# EAGLE board BEP33_2panel_v2 (EAGLE 7.7.0)
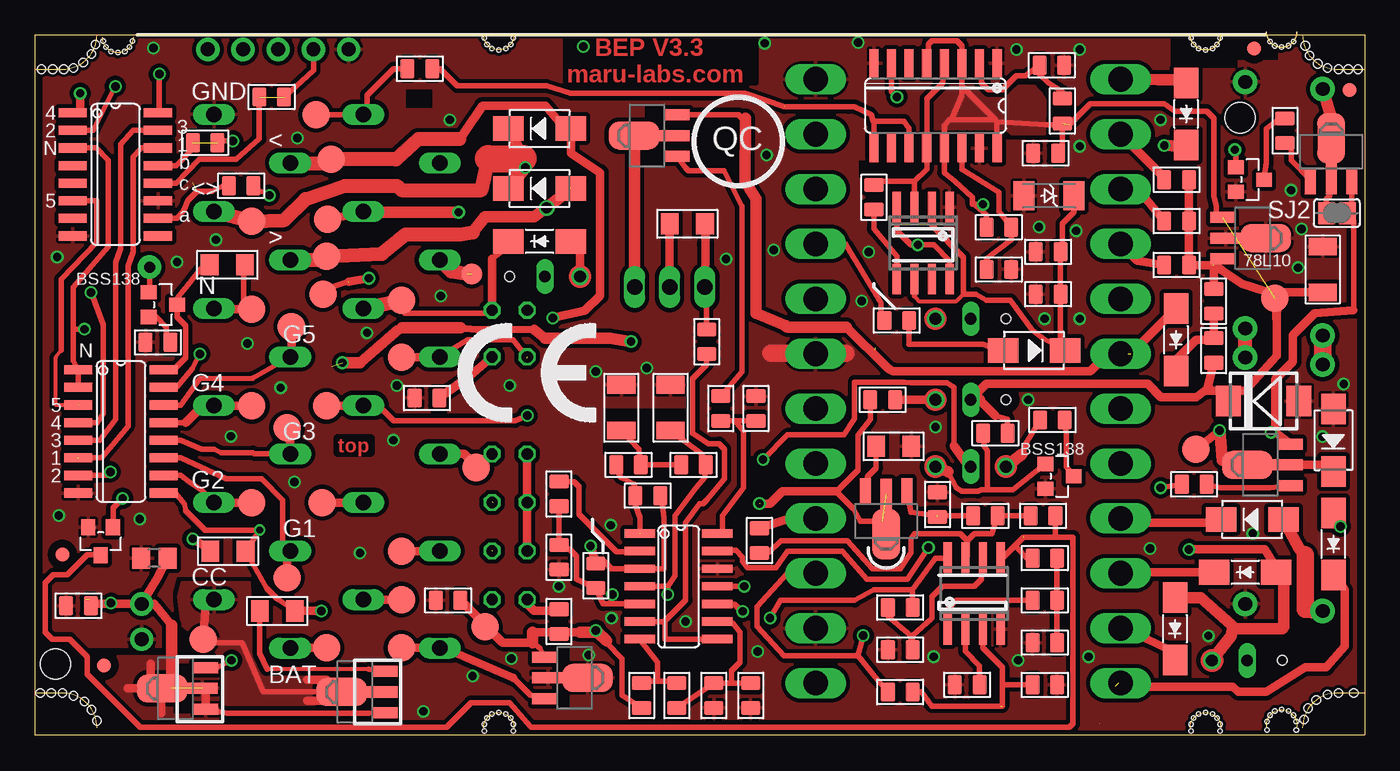
[diagram p0: board, top side]
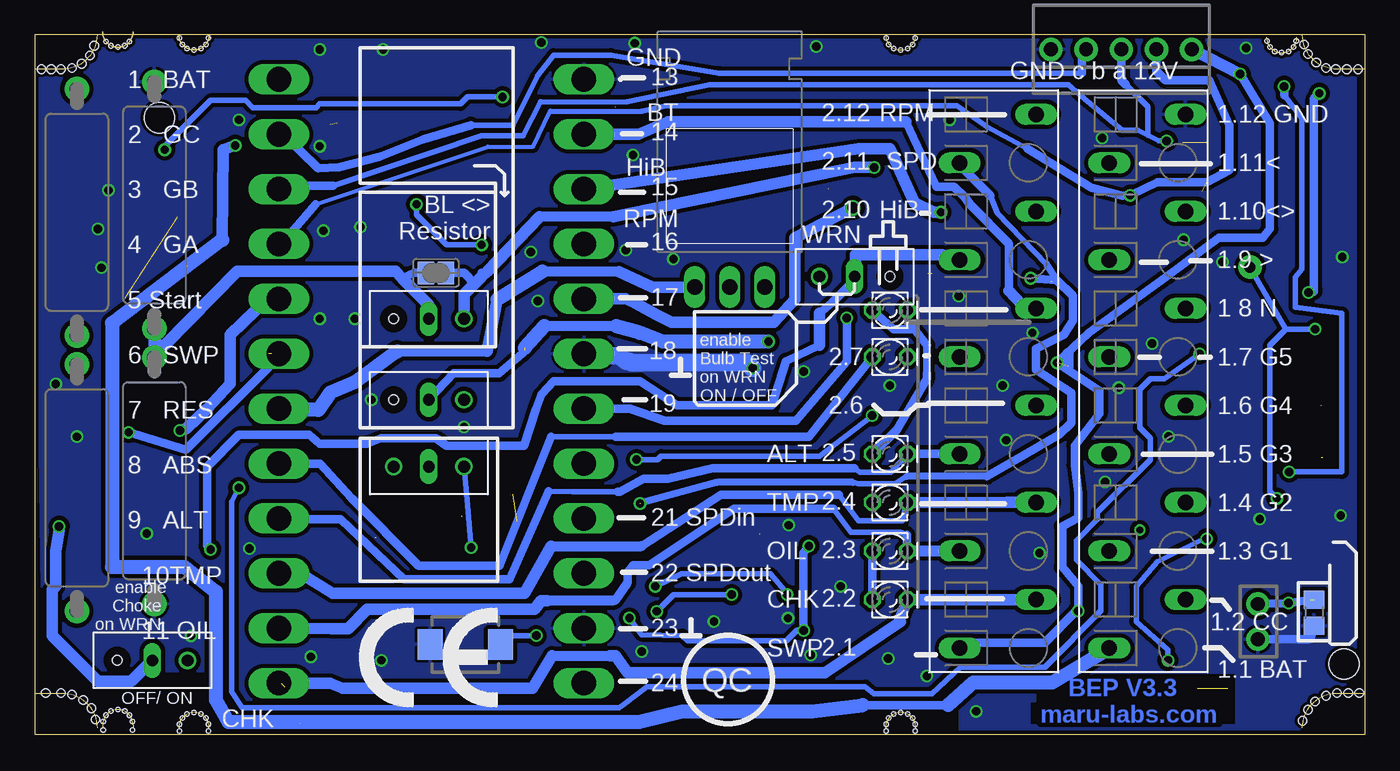
[diagram p1: board, bottom side, seen from below]

Size 96 x 50.5 mm. Coordinates in mm from the lower left corner, seen from the top.
Outline: 0,0 96,0 96,50.5 0,50.5 0,0
Copper layers (1*16): Top 0.035mm / dielectric 1.5mm / Bottom 0.035mm
Design rules "Vorlage BEP3 und hoeher multi-cb_035um-cu": minimum track width 6mil, minimum drill 12mil, track to track 12mil, track to pad 12mil, pad to pad 6mil, via to via 6mil, smd to smd 6mil, copper to edge 10mil, drill to drill 8mil, minimum pad ring 8mil, minimum via ring 6mil, stop-mask expansion 3mil, vias tented up to drill 0mil, thermal gap 8mil
Holes 2.18 mm at 1.5,5.1 87,44.5
Holes 0.6 mm at 4.4,49.8 4.1,49.1 3.5,48.5 2.8,48.1 2.1,48 1.3,48 0.5,48 0.4,3 1.2,3 2,3 2.8,2.8 3.6,2.4 4.1,1.8 4.5,1 91.6,1.1 91.9,1.9 92.5,2.5 93.3,2.9 94.1,3 95.2,3 95.5,48 94.8,48 94.1,48 93.3,48.1 92.6,48.4 92,49 91.7,49.7
Holes 0.3 mm at 83.45,0.75 83.65,1.2 84,1.5 84.5,1.6 85,1.5 85.35,1.2 85.55,0.75 32.45,0.75 32.65,1.2 33,1.5 33.5,1.6 34,1.5 34.35,1.2 34.55,0.75 88.95,0.95 89.15,1.4 89.5,1.7 90,1.8 90.5,1.7 90.85,1.4 91.05,0.95 34.55,0.25 32.45,0.25 85.55,0.25 83.45,0.25 88.95,0.35 91.05,0.35 34.55,50.25 34.35,49.8 34,49.5 33.5,49.4 33,49.5 32.65,49.8 32.45,50.25 85.55,50.25 85.35,49.8 85,49.5 84.5,49.4 84,49.5 83.65,49.8 83.45,50.25 90.85,50 90.5,49.7 90,49.6 89.5,49.7 89.15,50 7.05,50.05 6.85,49.6 6.5,49.3 6,49.2 5.5,49.3 5.15,49.6 4.95,50.05
tRestrict: area 41,20.2 to 47.5,23.5; area 26.8,45.2 to 28.7,46.5; area 58.4,15.8 to 60.2,17.8; area 44.1,41.1 to 45.5,45.4; area 37.3,1.9 to 38.6,6.4; area 10,1.6 to 11.4,5.1; area 88.4,21.6 to 90,22.8; area 86.4,48.7 to 89.7,51.4; area 82,48.1 to 86.8,51.1; area 59.5,40.2 to 63.7,41.4; area 13.4,33.2 to 14.5,34.9; area 7.3,50.5 to 82,50.5; 1 more areas
bRestrict: area 9.4,0.8 to 19.6,4.3; area 19.5,0.8 to 24.1,2.3; area 29.3,0.1 to 35.8,2.3; area 81.6,0.7 to 87.6,4.5; area 7.3,50.5 to 82.3,50.5
Milling: 30 lines

## Footprints (pad centres in the part's own frame; a part is rotated, then mirrored left to right if it is on the bottom)
12-PIN = drill 1.118 long: 1 19.25,-2.45; 2 15.75,3.05; 3 12.25,-2.45; 4 8.75,3.05; 5 5.25,-2.45; 6 1.75,3.05; 7 -1.75,-2.45; 8 -5.25,3.05; 9 -8.75,-2.45; 10 -12.25,3.05; 11 -15.75,-2.45; 12 -19.25,3.05
B2.0 = smd 2 x 2: TP 0,0
C1206 = smd 1.27 x 2.032: 1 -1.651,0; 2 1.651,0
C0805 = smd 1.397 x 1.016: 1 0,0.889; 2 0,-0.889
DO-214AC_SLIM = smd 2.2 x 1.77: 1 -2.242,0; 2 2.242,0
SOD-123_MINI-SMA = smd 1.5 x 2.1: A 1.8,0; C -1.8,0
DO214AA = smd 1.8 x 2.2: A 2.55,0; C -2.55,0
DO-214AC = smd 2.2 x 1.77: 1 -2.242,0; 2 2.242,0
DO214AA_BI = smd 1.8 x 2.2: A 2.45,0; C -2.65,0
FIDUCIAL_1MM = smd 1 x 1: 1 0,0
SO08 = smd 0.6 x 2.2: 1 -1.905,-2.6; 2 -0.635,-2.6; 3 0.635,-2.6; 4 1.905,-2.6; 5 1.905,2.6; 6 0.635,2.6; 7 -0.635,2.6; 8 -1.905,2.6
SOT89_ROUND = smd 0.8 x 1.8: 1 -1.499,-2.181; 3 1.499,-2.181 | smd 0.8 x 2.3: 2 0,-1.927 | smd 2.032 x 3.65: 2@1 0,0.94
SO16 = smd 0.66 x 2.032: 1 -4.445,-3.073; 2 -3.175,-3.073; 3 -1.905,-3.073; 4 -0.635,-3.073; 5 0.635,-3.073; 6 1.905,-3.073; 7 3.175,-3.073; 8 4.445,-3.073; 9 4.445,3.073; 10 3.175,3.073; 11 1.905,3.073; 12 0.635,3.073; 13 -0.635,3.073; 14 -1.905,3.073; 15 -3.175,3.073; 16 -4.445,3.073
SO14 = smd 0.6 x 2.2: 1 -3.81,-2.8; 2 -2.54,-2.8; 3 -1.27,-2.8; 4 0,-2.8; 5 1.27,-2.8; 6 2.54,-2.8; 7 3.81,-2.8; 8 3.81,2.8; 9 2.54,2.8; 10 1.27,2.8; 11 0,2.8; 12 -1.27,2.8; 13 -2.54,2.8; 14 -3.81,2.8
TO220H_NOHOLE = drill 1.118 long: 1 -2.54,-10.16; 2 0,-10.16; 3 2.54,-10.16
JP2_SMALLPADS = drill 0.85: 1 -2.54,0 | drill 0.85 long: 2 0,0 | hole 0.7: 2.54,0
JP2_ORIG_SMALLPADS = drill 0.85: 1 -2.54,0; 3 2.54,0 | drill 0.85 long: 2 0,0
LD260 = drill 0.813 octagon: A -1.27,0; K 1.27,0
SOT-23 = smd 1.016 x 1.143: 1 -0.889,-1.016; 2 0.889,-1.016; 3 0,1.016
SOT89 = smd 0.8 x 1.8: 1 -1.499,-2.181; 3 1.499,-2.181 | smd 0.8 x 2.3: 2 0,-1.927 | smd 2.032 x 3.65: 2@1 0,0.94
R0805 = smd 1.397 x 1.016: 1 0,0.889; 2 0,-0.889
R1206 = smd 1.27 x 1.524: 1 -1.27,0; 2 1.27,0
R0805' = smd 1.3 x 1.5: 1 -0.95,0; 2 0.95,0
V235/17_1MM = drill 1 pad 1.778: 1 -8.89,0; 2 8.89,0
SJ = smd 1.168 x 1.6: 1 -0.762,0; 2 0.762,0
SJ' = smd 1.2 x 1.6: 1 -0.725,0; 2 0.725,0
B1,27 = smd 1.5 x 1.5: TP 0,0
24-PIN_V2 = drill 1.778 long: 1 -21.78,-11; 2 -17.82,-11; 3 -13.86,-11; 4 -9.9,-11; 5 -5.94,-11; 6 -1.98,-11; 7 1.98,-11; 8 5.94,-11; 9 9.9,-11; 10 13.86,-11; 11 17.82,-11; 12 21.78,-11; 13 -21.78,11; 14 -17.82,11; 15 -13.86,11; 16 -9.9,11; 17 -5.94,11; 18 -1.98,11; 19 1.98,11; 20 5.94,11; 21 9.9,11; 22 13.86,11; 23 17.82,11; 24 21.78,11
22-23-2021 = drill 1 pad 1.676: 1 -1.27,0; 2 1.27,0
22-23-2051 = drill 1 pad 1.676: 1 -5.08,0; 2 -2.54,0; 3 0,0; 4 2.54,0; 5 5.08,0

## Placement (x,y rotation side)
1  [12-PIN]  15.99,25.5 270 bottom
2  [12-PIN]  26.79,25.5 270 bottom
6V  TPSB2.0  [B2.0]  32.5,7.78 0 top
10V  TPSB2.0  [B2.0]  89.5,31.5 0 top
C2  10u  [C1206]  92.96,33.56 90 top
C15  4.7u  [C0805]  73.41,48.29 270 top
C101  4.7u  [C0805]  72.9,3.59 90 top
C102  100nF  [C0805]  72.96,41.95 270 top
C103  100nF,  [C0805]  72.9,6.64 270 top
C104  100nF,  [C0805]  29.83,9.68 270 top
C105  100nF.  [C0805]  49.01,2.83 0 top
C106  100nF.  [C0805]  52.06,23.53 0 top
C107  100u  [C1206]  42.34,23.59 90 top
C108  100u  [C1206]  45.9,23.59 90 top
C109  2.2nF  [C0805]  73.14,31.78 90 top
C110  100nF  [C0805]  69.58,33.56 90 top
D1  SS12  [DO-214AC_SLIM]  82.36,28.49 270 top
D2  SS12  [DO-214AC_SLIM]  83.1,44.78 270 top
D4  Zen11  [SOD-123_MINI-SMA]  73.2,38.88 180 top
D101  Zen15  [DO214AA]  88.69,24.07 0 top
D102  1N4007,  [DO-214AC]  36.44,39.4 180 top
D103  1N4007,  [DO-214AC]  36.44,43.72 180 top
D104  SM6TDO214AA_BI  [DO214AA_BI]  65.01,6.51 180 bottom
D105  1N4007.  [DO-214AC]  93.73,21.24 270 top
D106  1N4007.  [DO-214AC]  87.87,15.53 180 top
D107  1N5817  [DO-214AC_SLIM]  87.36,11.72 180 top
D108  1N5817.  [DO-214AC_SLIM]  82.3,7.64 270 top
D109  1N5817.  [DO-214AC_SLIM]  93.73,13.75 270 top
D110  1N5817  [DO-214AC_SLIM]  36.44,35.59 180 top
D112  1N4007  [DO-214AC]  72.12,27.72 0 top
FID101  FIDUCIAL  [FIDUCIAL_1MM]  88,49.5 0 top
FID102  FIDUCIAL  [FIDUCIAL_1MM]  2,13 0 top
FID103  FIDUCIAL  [FIDUCIAL_1MM]  5,5 0 top
FID104  FIDUCIAL  [FIDUCIAL_1MM]  94.9,46.5 0 top
IC101  LM2904  [SO08]  67.81,10.19 0 top
IC102  78L06  [SOT89_ROUND]  38.98,4.1 270 top
IC104  78L10  [SOT89_ROUND]  87.91,35.82 270 top
IC105  4028  [SO16]  5.83,40.42 270 top
IC107  ULN2004  [SO16]  6.23,21.88 270 top
IC108  LM339  [SO14]  46.47,10.7 270 top
IC109  317TO202H_NOHOLE  [TO220H_NOHOLE]  45.84,42.45 0 bottom
IC110  555  [SO08]  64.12,35.47 180 top
IC111  4538  [SO16]  65.01,45.37 180 top
JP101  [JP2_SMALLPADS]  67.55,24.16 180 bottom
JP102  [JP2_SMALLPADS]  87.5,5.35 180 bottom
JP103  [JP2_SMALLPADS]  36.82,33.05 0 bottom
JP104  [JP2_SMALLPADS]  67.55,30 180 bottom
JP105  JP2E_ORIG  [JP2_ORIG_SMALLPADS]  67.55,19.34 180 bottom
LED101  [LD260]  34.28,27.25 0 bottom
LED102  [LD260]  34.28,9.75 0 bottom
LED103  [LD260]  34.28,13.25 0 bottom
LED104  [LD260]  34.28,16.75 0 bottom
LED105  [LD260]  34.28,20.25 0 bottom
LED106  [LD260]  34.28,30.62 0 bottom
Q1  J1  [SOT-23]  4.77,13.96 180 top
Q2  BA  [SOT89]  93.57,42.08 0 top
Q3  J1  [SOT-23]  87.7,40.05 270 top
Q101  BA.  [SOT89]  23.1,3.08 90 top
Q102  BA.  [SOT89]  10.15,3.33 90 top
Q103  MY  [SOT89]  61.46,15.4 180 top
Q104  BA  [SOT89]  88.44,19.46 90 top
Q105  BA  [SOT89]  44.18,43.21 90 top
Q106  J1  [SOT-23]  9.26,31.02 270 top
Q107  J1  [SOT-23]  73.97,18.64 270 top
R1  104  [R0805]  17.1,46 90 top
R2  104  [R0805]  12.3,42.7 90 top
R3  104  [R0805]  14.9,39.6 90 top
R4  100  [R0805]  8.9,28.3 90 top
R5  13  [R1206]  62,20.8 0 top
R6  2201  [R0805]  65.16,16.6 180 top
R8  4701  [R0805]  90.23,43.58 180 top
R9  13  [R1206]  13.9,33.9 0 top
R10  104  [R0805]  74.17,44.99 0 top
R12  100  [R0805]  85.09,27.72 0 top
R13  100  [R0805]  85.09,31.27 180 top
R101  102  [R0805]  3.16,9.3 270 top
R102  13  [R1206]  17.51,8.92 180 top
R103  R_user  [R0805']  8.64,12.73 180 top
R104  R_user  [R0805']  3.67,8.79 270 bottom
R105  4701  [R0805]  62.47,3.08 270 top
R106  13  [R1206]  13.96,13.24 180 top
R107  1002  [R0805]  67.3,3.59 90 top
R108  1002  [R0805]  72.9,9.68 270 top
R109  104  [R0805]  82.41,40.04 90 top
R110  104  [R0805]  82.41,37.05 90 top
R111  104  [R0805]  82.41,33.88 90 top
R112  102  [R0805]  72.9,12.73 270 top
R113  1002  [R0805]  62.47,9.18 90 top
R114  1002  [R0805]  62.47,6.13 90 top
R115  102  [R0805]  52.31,14 0 top
R116  4701  [R0805]  68.61,15.78 270 top
R117  2702  [R0805]  72.78,15.78 90 top
R119  2201  [R0805]  61.2,24.16 90 top
R120  1002  [R0805]  48.5,28.35 180 top
R121  1502  [R0805]  43.8,2.83 0 top
R122  2702  [R0805]  46.34,2.83 0 top
R123  2702  [R0805]  51.68,2.83 180 top
R124  1002  [R0805]  44.25,17.24 270 top
R125  104  [R0805]  42.85,19.46 270 top
R126  4701  [R0805]  49.52,23.53 0 top
R127  47  [V235/17_1MM]  92.95,17.81 90 bottom
R128  102  [R0805]  83.68,18.07 90 top
R129  47  [V235/17_1MM]  92.95,37.69 90 bottom
R130  104  [R0805]  47.55,19.46 270 top
R131  1502  [R0805]  40.5,11.46 180 top
R132  1002  [R0805]  37.83,12.8 180 top
R133  2201  [R0805]  37.83,17.37 0 top
R134  13  [R1206]  47.1,36.86 180 top
R135  104  [R0805]  69.33,21.75 270 top
R136  47  [V235/17_1MM]  87.36,18.32 90 bottom
R137  47  [V235/17_1MM]  87.36,38.2 270 bottom
R138  100  [R0805]  73.46,22.7 90 top
R140  2702  [R0805]  62.22,29.88 270 top
R141  104  [R0805]  73.14,34.83 270 top
R142  (1000)  [R0805]  37.83,8.16 0 top
R143  (101)  [R0805]  28.31,24.29 270 top
R144  (1002)  [R0805]  60.57,38.77 0 top
R145  2702  [R0805]  69.58,36.61 270 top
R146  1002  [R0805]  27.8,48.04 90 top
SJ2  [SJ]  93.98,37.62 180 top
SJ101  [SJ']  67.04,33.31 180 bottom
START  TPSB2.0  [B2.0]  83.81,20.61 0 top
TP1  TPSB2.0  [B2.0]  21.07,6.26 0 top
TP2  TPSB2.0  [B2.0]  12.18,6.89 0 top
TP3  TPSB2.0  [B2.0]  18.21,11.34 0 top
TP4  TPSB2.0  [B2.0]  15.67,16.73 0 top
TP5  TPSB2.0  [B2.0]  18.21,22.13 0 top
TP6  TPSB2.0  [B2.0]  15.67,23.72 0 top
TP7  TPSB2.0  [B2.0]  18.53,29.43 0 top
TP8  TPSB2.0  [B2.0]  15.67,30.7 0 top
TP9  TPSB2.0  [B2.0]  21.07,34.51 0 top
TP10  TPSB2.0  [B2.0]  15.67,37.05 0 top
TP11  TPSB2.0  [B2.0]  21.39,41.5 0 top
TP12  TPSB2.0  [B2.0]  26.47,6.26 0 top
TP13  TPSB2.0  [B2.0]  20.31,44.74 0 top
TP16  TPSB2.0  [B2.0]  26.47,9.75 0 top
TP17  TPSB2.0  [B2.0]  26.47,13.24 0 top
TP18  TPSB2.0  [B2.0]  20.75,16.73 0 top
TP19  TPSB2.0  [B2.0]  31.86,19.27 0 top
TP21  TPSB2.0  [B2.0]  21.07,23.72 0 top
TP22  TPSB2.0  [B2.0]  26.47,27.21 0 top
TP23  TPSB2.0  [B2.0]  26.47,31.34 0 top
TP24  TPSB1,27  [B1,27]  31.55,33.24 0 top
TP25  TPSB2.0  [B2.0]  21.13,37.18 0 top
TP26  TPSB2.0  [B2.0]  20.82,31.78 0 top
U$1  [CE_10.00]  72.63,1.94 0 bottom
U$2  [CE_10.00]  30.47,22.47 0 top
X101  [24-PIN_V2]  67.36,25.5 270 bottom
X102  22-23-2021  [22-23-2021]  7.74,8.16 90 bottom
X103  22-23-2051  [22-23-2051]  17.58,49.44 180 bottom

## Library data of the parts
1 2 = con WAGO BMW
6V 10V START TP1-TP13 TP16-TP19 TP21-TP26 = testpin_BMW
C2 C107 C108 = Seeed-Capacitor-2016; MPN: GRM31CR60J107ME39L
C15 C101 = Seeed-Capacitor-2016; MPN: CC0805KKX5R8BB475
C102-C106 C109 C110 = Seeed-Capacitor-2016; MPN: CC0805KRX7R9BB104
D1 D2 D107-D110 = Diode-do214ac
D4 = diode
D101 D104 = Suppressor_Diode_DO214AA
D102 D103 D105 D106 D112 = Diode-do214ac; MPN: 1N4007
FID101-FID104 = Fiducial
IC101 IC109 = linear_BMW
IC102 IC104 = 78LXX
IC105 = 4028
IC107 = uln-udn
IC108 = LM339
IC110 = linear
IC111 = 45xx
JP101-JP105 = Switch Aliexpress 2
LED101-LED106 = led
Q1 Q3 Q106 Q107 = Seeed-Transistor-2016; MPN: BSS138W-7-F
Q2 Q101-Q105 = Transistor_SOT89
R1-R3 R107-R111 R120 R121 R124 R125 R130-R132 R135 R140 R141 R144 = Seeed-Resistor-2016; MPN: RC0805FR-0710KL
R4 R115 = Seeed-Resistor-2016; MPN: RC0805JR-07220RL
R5 R9 R102 R106 R134 = Seeed-Resistor-2016; MPN: RC1206JR-0713RL
R6 R101 R112-R114 R128 = Seeed-Resistor-2016; MPN: RC0805JR-071KL
R8 R10 R105 R116 R117 R122 R123 R126 R145 R146 = Seeed-Resistor-2016; MPN: RC0805JR-074K7L
R12 R13 R119 R133 R138 = Seeed-Resistor-2016; MPN: RC0805JR-072K2L
R103 R104 R127 R129 R136 R137 = rcl
R142 R143 = Seeed-Resistor-2016; MPN: RC0805JR-07100RL
SJ2 = jumper
SJ101 = solder-jumper
U$1 U$2 = logo
X101 = con_BMW
X102 = con_Molex_BMW; MF: MOLEX; MPN: 22-23-2021; OC_FARNELL: 1462926; OC_NEWARK: 25C3832
X103 = con_Molex_BMW; MF: MOLEX; MPN: 22-23-2051; OC_FARNELL: 1462952; OC_NEWARK: 38C9178

## Nets
+10V: 10V.TP C102.1 IC104.1 IC110.4 IC110.8 IC111.3 IC111.5 IC111.13 IC111.16 R10.2 R145.2
+12V: 2.1 C2.1 D101.C IC102.3 IC104.3 IC105.16 IC107.9 JP101.2 R12.2 R13.2 R102.1 R106.1 R109.2 R110.2 R111.2 R135.1 TP12.TP X103.1
+12V1: 2.11 Q103.2 R119.1 TP26.TP
GND: 1.12 C2.2 C15.1 C101.2 C102.2 C103.2 C104.2 C105.2 C106.1 C107.2 C108.2 C109.1 C110.2 D4.A D101.A D104.A D105.1 IC101.4 IC102.2 IC102.2@1 IC104.2 IC104.2@1 IC105.8 IC105.11 IC107.8 IC108.12 IC110.1 IC111.1 IC111.8 IC111.15 Q1.2 Q3.2 Q107.2 R4.1 R5.2 R6.2 R101.2 R103.2 R104.2 R107.1 R114.1 R123.1 R132.1 R136.1 R137.1 R141.2 R143.2 X101.13 X101.18 X101.23 X102.1 X103.5
N$1: 2.9 D107.1 D108.1 JP102.1 JP103.2 TP24.TP
N$2: IC105.10 R3.1 R3.2 R111.1 X101.4 X103.2
N$3: IC105.13 R2.1 R2.2 R110.1 X101.3 X103.3
N$4: 2.7 LED101.A TP22.TP X101.8
N$5: Q101.3 R102.2
N$6: Q2.1 R8.1
N$7: IC101.2 R107.2
N$8: R127.2 R129.1
N$9: Q102.3 R106.2
N$11: D105.2 Q104.2 START.TP X101.5
N$12: 2.2 D109.2 LED102.K TP16.TP X101.12
N$13: 2.3 D108.2 LED103.K TP17.TP X101.11
N$14: 2.4 D107.2 LED104.K TP18.TP X101.10
N$15: IC109.3 Q105.2
N$16: IC108.6 IC108.8 R120.1
N$17: IC105.12 R1.1 R1.2 R109.1 X101.2 X103.4
N$18: IC105.15 IC107.5
N$19: 2.8 D110.2 LED106.K TP23.TP X101.14
N$20: 1.9 D102.1 TP9.TP X101.17
N$21: 1.11 D103.1 TP11.TP X101.19
N$22: IC111.9 IC111.11 R146.2
N$23: D104.C R105.2 X101.22
N$24: C101.1 IC101.3 R105.1
N$25: 1.6 IC107.13 TP6.TP
N$26: 1.7 IC107.14 TP7.TP
N$27: D1.2 R12.1 R13.1
N$28: 2.6 JP105.2 TP21.TP
N$29: JP101.1 R119.2
N$30: C105.1 IC108.9 R122.2 R123.2
N$31: C106.2 IC108.14 R126.2
N$32: Q3.3 R8.2
N$34: LED101.K R143.1
N$35: IC109.1 R120.2 R134.1 X101.7
N$36: Q105.1 R126.1
N$37: IC105.2 IC107.7
N$38: 1.3 IC107.11 TP3.TP
N$39: 1.5 IC107.12 TP5.TP
N$41: LED102.A LED103.A LED104.A LED105.A LED106.A R142.1
N$42: R140.2 X101.16
N$43: Q104.1 R128.2
N$44: IC105.3 IC107.1 IC107.2 Q1.1 Q106.1
N$45: C107.1 R125.1 R130.2
N$46: C108.1 IC108.4 IC108.10 R130.1
N$47: IC108.5 IC108.11 R131.1 R132.2 R133.2
N$48: Q107.3 R138.2
N$49: IC111.7 Q3.1
N$50: IC105.1 IC107.4
N$51: R115.1 X101.21
N$52: IC107.16 Q106.3 R9.1
N$53: 2.10 TP25.TP X101.15
N$54: D106.1 R127.1
N$55: 2.5 D106.2 LED105.K TP19.TP X101.9
N$56: IC105.14 IC107.6
N$57: Q101.1 Q102.1 Q102.2 R101.1 R103.1 R104.1 X102.2
N$58: 1.8 R9.2 TP8.TP
N$59: 1.2 Q101.2 TP2.TP
N$60: IC108.13 JP105.1 Q107.1 R135.2
N$61: IC105.6 IC107.3
N$64: IC109.2 R134.2
N$65: IC110.5 R144.2
N$67: 1.4 IC107.10 TP4.TP
N$69: 1.1 D2.2 TP1.TP
N$83: IC108.7 R121.1 R122.1
N$84: Q106.2 R4.2
N$85: Q103.1 R6.1 R116.2
N$86: IC110.3 IC111.4 IC111.12 R144.1
N$87: D112.1 R140.1
N$88: IC107.15 R128.1
N$89: C110.1 IC111.14 R145.1
N$90: 2.12 R146.1 TP13.TP
N$91: D2.1 X101.1
N$92: IC101.1 R108.2
N$93: 1.10 D102.2 D103.2 JP104.1 SJ101.1 TP10.TP
N$94: JP104.2 R136.2 R137.2 SJ101.2
N$95: D109.1 JP102.2
N$96: C103.1 R108.1 R112.1
N$97: IC101.5 Q1.3 R112.2 R117.2
N$98: D110.1 JP103.1
N$99: JP105.3 R138.1
N$100: Q103.3 R5.1
N$101: IC101.6 R113.1 R114.2
N$102: C109.2 D4.C D112.2 IC110.2 IC110.6 R141.1
N$103: C15.2 IC111.2 R10.1
N$104: Q2.2 R129.2 SJ2.2
N$107: IC101.7 R115.2 R116.1 R117.1
N$108: IC108.2 R133.1
N$580: IC108.1 R124.2 R125.2
V+: D1.1 Q2.3 Q104.3 Q105.3 SJ2.1 X101.6
VCC: 6V.TP C104.1 IC101.8 IC102.1 IC108.3 R113.2 R121.2 R124.1 R131.2 R142.2

## Tracks (layer width: path | path; a pad name or v marks a point on that pad's centre or on a via)
+10V  (via drill 0.6)  (2 unrouted)
  Top 0.406: 69.33,44.35 66.92,46.77 IC111.3 66.92,49.7 66.55,50.07 64.77,50.07 64.52,49.82 64.52,48.58 IC111.5 | 69.46,44.23 IC111.16 | 67.68,38.39 68.69,37.5 R145.2 | 66.16,44.35 66.03,44.35 65.65,43.97 IC111.13 65.65,40.55 66.41,39.91 67.68,38.77 67.68,38.39 | 66.16,44.35 69.33,44.35 | 69.33,44.35 69.46,44.23 | IC110.4 62.22,36.35 63.23,35.34 v63.74,35.34 64.89,35.34 66.03,34.2 IC110.8 | 69.46,44.23 73,43.99 74.69,43.99 76.2,45.5 81.53,45.5 82.3,44.99 84.59,44.99 85.1,44.48 85.1,38.89 85.27,38.13 85.27,37.58 IC104.1 | v68.44,38.26 67.68,38.26 67.68,38.39 | 66.16,44.35 66.92,46.13 66.92,46.51 67.04,46.51 | R10.2 74.17,42.26 C102.1
  Bottom 0.406: v68.44,38.26 68.44,37.5 66.28,35.34 v63.74,35.34
  pour Top: 64.38,46.77 72.14,46.77 72.38,46.51 72.63,46.26 72.9,45.75 72.89,43.34 70.47,43.34 70.09,43.72 64.5,43.72 64.5,46.64
+12V  (via drill 0.5, 0.6)  (3 unrouted)
  Top 0.35: 10.8,16.67 10.91,16.16
  Top 0.406: IC105.16 9.01,44.86 v9.01,47.66 | R102.1 17.51,9.81 16.75,10.57 R106.1 v16.24,14.76 12.31,14.76 10.91,16.16 | IC102.3 35.78,2.85 34.53,4.1 | R135.1 70.22,22.77 69.33,23.02 | IC107.9 10.17,17.43 10.8,16.67
  Top 0.5: 30.72,29.37 31.86,29.24 36.06,29.24
  Top 0.61: 26.09,6.64 TP12.TP 2.1 29.58,6.25 34.53,4.1 | 26.28,29.24 26.53,29.37 | R102.1 v20.69,8.92 | 69.33,23.02 68.19,24.16 | R109.2 R110.2 R111.2 85.09,33.88 | 85,33.81 85.51,33.64 | 89.66,29.5 89.66,30.07 89.73,31.72 87.12,32.54 85.67,33.49 85.16,33.88 | 89.66,29.5 89.66,27.34 87.38,24.8 86.11,24.8 | 86.11,24.8 84.58,24.8 | 84.58,24.8 84.77,25.05 83.82,24.35 81.28,24.35 80.33,25.3 68.69,25.3 JP101.2 | C2.1 89.53,31.91 89.66,29.5 | R12.2 84.58,24.8 | D101.C 86.14,24.25 86.11,24.8 | 85.09,33.88 85.16,33.88 | 85.16,33.88 IC104.3 | R13.2 85.09,33.88
  Top 0.711: 26.28,29.24 23.48,26.83 | 36.06,29.24 36.82,28.61
  Top 0.813: 23.48,26.83 v22.21,26.83 | 26.53,29.37 30.72,29.37 | 36.82,28.61 41.52,28.61 v43.04,28.35 | 68.19,24.16 JP101.2
  Bottom 0.61: v9.01,47.66 6.85,44.13 6.85,36.48 7.35,35.85 10.53,35.85 14.34,33.05 19.93,28.99 v22.21,26.83 19.16,24.8 19.16,23.15 20.94,20.86 20.94,19.46 20.69,17.43 20.69,15.65 21.83,15.02 21.83,12.1 20.69,10.7 v20.69,8.92 20.82,8.92 23.1,6.64 28.85,6.64 2.1 | JP101.2 65.77,26.07 62.47,26.07 60.82,27.46 60.63,27.72
  Bottom 0.711: 54.03,29.47 59.23,29.47
  Bottom 0.813: v9.01,47.66 X103.1 | 21.45,27.46 21.45,26.57
  Bottom 1.016: v43.04,28.35 50.66,28.35 52.31,28.99 54.03,29.47 | 59.23,29.47 60.63,27.91
+12V1  (via drill 0.6)  (3 unrouted)
  Top 0.406: TP26.TP 21.07,32.16 22.59,32.67 | R119.1 60.31,22.76 59.42,21.61 59.42,19.08 57.9,17.56 57.9,17.5 59.1,16.3 59.3,15.9 59.6,15.4 61.2,15.4 61.46,15.14 | Q103.2
  Top 0.61: 22.66,32.67 v24.12,32.92 | v52.31,16.67 53.09,16.67 53.98,17.56 57.9,17.56
  Bottom 0.406: 22.98,33.94 23.86,34.83 26.53,37.62 27.04,38.89 | 33.07,18.64 33.9,18.09 36.56,18.09 36.95,18.19
  Bottom 0.508: 22.98,33.94 22.21,32.8 | 27.29,18.64 33.07,18.64 | 36.95,18.19 46.72,18.19 52.32,16.68
  Bottom 0.61: 27.29,18.64 25.26,19.78 22.09,21.62 21.2,22.51 21.2,24.67 23.74,26.32 23.74,27.84 21.7,28.86 21.07,29.88 21.07,31.66 22.21,32.8 v24.12,32.92 | 2.11 29.23,41.09 27.04,38.89
GND  (via drill 0.6)  (1 unrouted)
  Top 0.406: IC102.2@1 IC102.2
  Top 1.27: 58.53,27.53 53.14,27.53
  Bottom 0.61: X102.1 3.92,6.89 R104.2
  Bottom 1.27: v44.18,26.45 44.56,26.83 52.95,26.83 53.07,26.96 53.33,26.96 53.84,27.34 54.98,27.34
  other vias: 59.68,31.27 23.48,13.11 13.08,35.7 37.83,10.7 40.5,26.19 7.58,15.56 1.63,34.45 76.06,5.62 34.28,25.18 46.98,8.16 28.05,1.68 15.36,28.23 65.01,22.2 75.43,49.44 26.15,25.18 29.32,31.66 52.82,41.81 80.51,13.43 23.99,28.99 49.9,34.32 75.43,30 72.48,36.63 75.43,42.45 94.48,25.3 52.19,6 71.69,24.16 64.89,5.62 25.9,21.24 60.19,34.83 29.96,44.35 39.6,49.63 52.7,49.88 18.96,43.03 8.56,49.53 10.28,34.1 17.75,25.03 14.15,21.53 18.75,18.23 41.58,15.11 41.63,8.4 87.91,14.5 84.71,7.13 91.17,33.69 81.27,44.35 70.85,49.44 59.42,49.94 53.33,34.96 90.67,39.27 75.17,36.35 72.89,30 70.98,5.37 1.74,15.82 92.95,21.5 91.43,36.48 31.61,4.22 34.41,5.49 39.99,5.75
  pour Top (rank 3): 95.3,50.58 0.7,50.58 0.7,7.4 0.5,6.38 9.89,6.38 13.07,6 13.07,0.41 95.3,0.41
  pour Bottom: 0.7,50.58 0.7,0.41 95.3,0.41 96.01,50.58
N$1  (via drill 0.6)  (1 unrouted)
  Top 0.61: 89.65,11.97 88.76,13.37 v83.3,13.37 83.68,13.37
  Top 0.813: 89.65,11.97 D107.1 90.16,11.08 90.16,7.78 90.03,7.65 86.68,7.65 | D108.1 84.15,9.88 86.68,7.65 | 86.68,7.65 86.44,7.55 86.36,7.12 JP102.1
  Top 1.016: 31.23,33.24 30.1,33.42 30.07,33.42 2.9
  Bottom 0.61: 39.36,28.1 41.77,26.96 42.79,23.78 49.65,23.78 52.31,25.51 58.53,25.51 59.42,24.54 59.8,23.53 60.69,20.86 66.28,20.86 67.04,21.37 70.98,21.37 72,20.99 75.43,20.99 76.19,21.62 81.27,21.62 83.55,19.34 83.55,13.62 v83.3,13.37 | 39.36,30.38 38.47,31.15 36.82,32.8 JP103.2
  Bottom 0.813: 39.36,28.1 39.36,30.38 | 2.9 30.54,34.64 36.76,34.64 36.76,33.12 JP103.2
N$2  (via drill 0.6)  (1 unrouted)
  Top 0.406: IC105.10 10.28,37.24 10.78,37.88 11.04,38.5 11.74,39.2 12.8,39.2 13.6,39.6 R3.1 | R3.2 15.68,39.51 v16.94,38.91
  Top 0.61: R111.1 79.57,34.2 X101.4
  Bottom 0.305: 75.71,38.26 63.28,42.42 60.02,42.42 58.79,44.99
  Bottom 0.356: 58.79,44.99 52.19,44.99
  Bottom 0.406: 52.19,44.99 50.41,45.37 29.45,45.37 27.42,43.97 27.29,43.85 24.37,42.26
  Bottom 0.61: X101.4 78.15,35.47 75.71,38.26 | 24.37,42.26 19.74,39.47 17.51,38.87 v16.94,38.91 14.97,39.85 11.42,39.85 9.77,40.74 9.77,43.97 11.23,47.21 14.4,47.21 15.04,47.85 X103.2
N$3  (via drill 0.6)  (1 unrouted)
  Top 0.406: IC105.13 10.21,41.05 11.41,42.25 R2.1 | R2.2 13.32,42.83 v14.3,42.83
  Top 0.61: R110.1 79.59,39.4 X101.3
  Bottom 0.356: 59.49,45.68 53.26,45.68
  Bottom 0.406: 74.47,39.59 63.74,43.21 60.76,43.21 59.49,45.68 | 53.26,45.68 47.3,46.9 21.39,46.9 20.24,45.88 17.51,43.59 16.37,43.59 14.88,42.84 | 14,42.83 14.21,42.83 | 14.21,42.83 v14.3,42.83 | v14.3,42.83 14.88,42.84 | 17.26,46.9 15.67,45.31 15.67,43.25 14.88,42.84 | v14.3,42.83 14.21,42.83
  Bottom 0.61: X101.3 77.98,39.59 74.47,39.59 | X103.3 17.58,47.21 17.26,46.9
N$4  (1 unrouted)
  Top 0.406: 2.7 31.23,28.48 34.53,28.48 35.51,27.25
  Top 0.61: TP22.TP 29.2,27.21 2.7 | 35.51,27.25 LED101.A
  Bottom 0.406: 58.73,21.5 54.09,21.5
  Bottom 0.61: X101.8 75.4,19.56 73.14,17.05 68.28,12.19 62.44,12.19 58.73,21.5 | 54.09,21.5 40.12,21.5 35.8,26.96 35.67,27.08 35.48,27.15
N$5
  Top 0.305: 24.12,4.73 16.78,4.73
  Top 0.406: Q101.3 24.12,4.73 | 16.78,4.73 16.24,5.87 16.24,8.41 15.99,8.67
  Top 0.61: 15.99,8.67 R102.2
N$6
  Top 0.406: Q2.1 92.07,40.05 90.68,41.43 90.68,42.75 R8.1
N$7
  Top 0.406: IC101.2 67.17,6 68.19,4.99 R107.2
N$8
  Top 1.27: R127.2 R129.1
N$9  (via drill 0.6)
  Top 0.406: v14.21,5.37 13.2,4.86 Q102.3 | 11.29,14.38 v11.42,14.13 | 12.43,13.49 R106.2
  Top 0.61: v11.42,14.13 12.43,13.49
  Bottom 0.406: v11.42,14.13 11.42,14.26 14.97,12.48 16.5,10.7 16.5,8.16 14.21,6.13 v14.21,5.37
N$10
  Top 1.016: 87.38,27.21 87.38,29.37
N$11  (via drill 0.6)
  Top 0.406: Q104.2 85.71,19.78
  Top 0.61: START.TP v85.52,21.94 | Q104.2 93.15,19.46 93.98,19.27 93.34,19.38 D105.2
  Top 0.813: v85.52,21.94 85.71,19.78
  Bottom 0.813: X101.5 79.2,31.44 81.9,28.86 81.9,25.3 83.55,23.53 85.08,22.07 v85.52,21.94
N$12  (1 unrouted)
  Top 0.61: TP16.TP 2.2 | 77.97,3.46 86.49,3.46 86.87,3.08 88.9,3.08 91.69,4.86 93.22,4.86 94.54,6.38 94.54,10.45 94.23,10.95 D109.2
  Bottom 0.711: 58.66,5.7 54.47,5.7
  Bottom 0.813: X101.12 78.21,3.71 74.66,3.71 73.78,3.33 60.06,3.33 58.66,5.7 | 54.47,5.7 54.09,5.7 53.2,4.48 38.98,4.48 33.52,8.16 33.64,8.16 LED102.K 2.2
N$13  (1 unrouted)
  Top 0.61: TP17.TP 2.3 | X101.11 80.22,6.92 81.9,6.13 D108.2
  Bottom 0.406: 33.05,14.43 33.52,14.61 37.07,14.61 38.34,16.29
  Bottom 0.61: 33.05,13.24 33.05,14.43 | 38.34,16.29 45.52,16.29 51.68,12.22 52.82,12.22 53.2,11.72 53.2,10.95 54.1,9.67 54.27,9.67
  Bottom 0.711: 54.27,9.67 59.03,9.67
  Bottom 0.813: 2.3 33.05,13.24 | 59.03,9.67 59.44,9.67 59.93,9.05 72,9.05 73.39,7.65 74.56,7.65 X101.11
N$14  (1 unrouted)
  Top 0.61: TP18.TP 23.72,16.73 2.4 | X101.10 77.72,11.64 77.71,11.65 79.44,11.65 79.83,11.72 D107.2
  Bottom 0.406: 37.96,17.3 36.56,15.42 33.39,15.42 33.07,16.73
  Bottom 0.61: 52.19,13.61 46.47,17.3 37.96,17.3
  Bottom 0.711: 58.73,13.61 52.19,13.61
  Bottom 0.813: X101.10 78.2,11.65 76.84,11.65 74.49,10.19 60.63,10.19 58.73,13.61 | 33.07,16.73 25.82,16.75 2.4
N$15
  Top 0.406: Q105.2 43.3,43.21 43.3,42.96
  Top 0.813: IC109.3 43.3,42.96
N$16
  Top 0.406: 45.48,8.16 45.48,6.89 IC108.8 | 45.48,8.16 IC108.6 | 45.48,8.16 45.48,8.2 46.98,9.7 46.98,15.27 47.99,16.67 48.25,16.67 48.5,16.92 49.77,18.45 49.77,20.61 49.39,20.99 48.63,20.99 47.49,21.75 47.49,25.69 48.5,26.7 R120.1
N$17  (1 unrouted)
  Top 0.406: IC105.12 10.21,39.78 11.86,41.5 14.55,41.5 16.21,42.98 16.21,43.09 R1.1 | R1.2 20.12,47.93 X103.4
  Top 0.61: R109.1 81.41,40.29 79.12,42.58 78.6,43.09 X101.2
  Bottom 0.406: 64.5,43.97 61.47,43.97 59.69,47.53 58.53,49.03 54.41,49.03 46.6,47.72 20.43,47.72
  Bottom 0.61: X101.2 78.13,43.4 75.55,40.86 74.03,40.93 71.11,41.69 67.93,42.96 64.5,43.97 | X103.4 20.43,49.44 20.43,47.72
N$18
  Top 0.406: IC105.15 7.1,43.59 6.21,42.58 6.21,35.08 5.85,34.09 5.85,22.77 4.71,21.24 IC107.5
N$19
  Top 0.406: 26.61,31.19 26.7,30.38 32.82,30.38 32.82,30.56 LED106.K | 33.01,34.34 34.2,35.23 D110.2
  Top 0.61: LED106.K 33.01,34.34
  Top 1.016: 2.8 TP23.TP 26.61,31.19
  Bottom 0.61: 33.13,44.23 30.91,39.53 29.64,39.53 28.88,38.77 28.5,38.26 25.71,35.4 25.71,32.04 | 24.73,31.02 2.8
  Bottom 0.813: X101.14 52.42,43.32 50.28,44.23 33.13,44.23 | 25.71,32.04 24.73,31.02
N$20  (via drill 0.81)  (1 unrouted)
  Top 0.813: 31.61,36.23 32.5,37.37 36.06,37.37 v36.95,38.01 38.72,39.38
  Top 1.016: 1.9 20.81,34.25 TP9.TP 25.06,34.69 26.79,36.1 30.72,36.1 31.61,36.23
  Bottom 0.813: X101.17 53.37,31.44 52.69,31.15 51.04,30.26 50.03,29.75 42.66,29.75 41.14,31.4 41.14,35.85 v36.95,38.01
N$21  (via drill 0.6)
  Top 0.61: 30.66,42.96 32.31,45.37 36.86,45.37 37.85,44.23 38.72,43.72 | 38.72,43.72 38.72,41.94 40.82,40.55 40.82,31.66 39.67,30.58 v37.39,30.07 | D103.1 38.72,43.72
  Top 1.016: 30.66,42.96 27.67,42.96 26.09,41.5 TP11.TP 21.07,41.18 19.2,41.18 1.11
  Bottom 0.61: X101.19 53.02,23.52 50.53,22.64 41.07,22.64 37.39,26.96 v37.39,30.07
N$22  (1 unrouted)
  Top 0.406: IC111.11 63.11,43.75 62.75,44.26 60.5,44.25 60.38,44.7 | 60.38,44.7 60.57,44.1 IC111.9 | 60.38,44.7 59.17,45.31 58.74,45.3 54.09,45.3 | R146.2 29.26,48.04 30.5,46.8 36.93,46.8 38.68,46.27 51.25,46.27 54.1,45.3
N$23  (via drill 0.6)
  Top 0.406: X101.22 54.34,11.64 52.13,9.23 52.13,7.83 54.09,5.7 59.42,5.7 60.64,4.16 | 60.64,4.16 R105.2 | v59.8,7.14 59.42,5.74 60.64,4.16
  Bottom 0.406: D104.C 62.34,6.51 62.34,6.64 61.84,7.14 v59.8,7.14
N$24  (1 unrouted)
  Top 0.406: 69.71,2.06 64.76,2.06 64,3.08 R105.1 | IC101.3 68.44,6.26 69.84,4.86 69.84,3.59 | 69.84,3.59 69.84,2.06 | C101.1 69.84,3.59
N$25
  Top 0.406: IC107.13 10.91,22.51
  Top 0.61: TP6.TP 12.97,23.72 1.6 12.43,23.78 11.8,23.4 10.91,22.51
N$26
  Top 0.406: 1.7 15.73,25.73 11.93,25.69 10.53,23.78 IC107.14
  Top 0.61: TP7.TP 18.53,27.34 1.7
N$27
  Top 0.61: D1.2 82.36,27.02 83.82,28.48 84.96,28.48 R12.1 R13.1
N$28  (via drill 0.6)
  Top 0.406: v35.55,23.02 34.66,22.64 25.9,22.64 24.78,23.75 2.6 | v52.57,19.84 54.34,21.62 58.41,21.62 59.17,22.78 59.17,25.43 62.73,25.43 63.23,25.39 65.84,25.39 66.35,25.05 66.35,20.86 | JP105.2 67.42,19.34
  Top 0.61: TP21.TP 23.7,23.72 2.6 | 67.42,19.34 66.35,20.86
  Bottom 0.406: v52.57,19.84 51.04,19.84 50.79,20.1 39.36,20.1 v35.55,23.02
N$29
  Top 0.61: JP101.1 R119.2
N$30
  Top 0.406: R122.2 C105.1 50.28,3.71 | IC108.9 50.41,8.03 50.91,7.4 50.91,5.24 50.28,4.6 50.28,3.71 | 50.28,3.71 R123.2
N$31
  Top 0.406: IC108.14 49.65,14.58 49.65,15.78 51.17,17.81 51.17,21.88 50.53,22.64 | R126.2 50.53,22.64 | 50.53,22.64 C106.2
N$32
  Top 0.406: R8.2 89.9,44.47 88.9,43.72 88.9,41.24 Q3.3
N$34
  Top 0.61: LED101.K 31.38,25.85 R143.1
N$35
  Top 0.406: R120.2 48.5,32.71 IC109.1
  Top 0.61: R134.1 48.4,35.36 IC109.1
  Bottom 0.711: 53.84,33.41 59.36,33.41
  Bottom 0.762: 63.36,27.64 69.84,27.64
  Bottom 0.813: 53.84,33.41 51.42,32.29 IC109.1 | 62.62,31.38 63.36,27.64
  Bottom 1.016: 59.36,33.41 62.62,31.38 | X101.7 78.12,23.42 75.52,23.42 74.66,24.67 72.89,25.43 69.84,27.64
N$36
  Top 0.406: R126.1 51.04,26.19 51.04,38.13 49.75,40.7 47.18,40.7 46.98,40.9 Q105.1
N$37  (via drill 0.6)
  Top 0.406: IC105.2 4.24,43.59 v5.83,46.77 | IC107.7 5.21,18.7 v5.47,18.95
  Bottom 0.406: 5.83,46.13 4.56,44.48 4.56,33.56 5.01,33.01 5.01,30.85 1.66,30.38 1.66,18.95 v5.47,18.95
  Bottom 0.61: v5.83,46.77 5.83,46.13
N$38
  Top 0.406: 1.3 17.89,13.76 17.89,16.92 16.37,18.45 13.83,18.45 10.55,19.97 IC107.11
  Top 0.61: TP3.TP 18.21,13.02 1.3
N$39
  Top 0.406: 1.5 15.85,20.25 15.74,20.35 13.45,20.35 12.94,20.61 12.05,20.61 10.55,21.24 IC107.12
  Top 0.61: 1.5 18.44,21.9 TP5.TP
N$41
  Top 0.61: LED102.A 35.55,9.43 36.06,8.92 37.64,8.92 R142.1 | LED103.A LED104.A LED105.A
  Bottom 0.508: 31.61,26.07 31.61,28.1
  Bottom 0.61: LED102.A LED103.A | 31.61,26.07 31.61,25.69 33.77,22 LED105.A | 31.61,28.1 32.5,29.24 34.04,29.24 LED106.A
N$42
  Top 0.406: X101.16 58.47,35.4 58.53,35.34 61.08,31.15 61.08,30.51 R140.2
N$43
  Top 0.406: R128.2 85.59,17.81 89.14,17.82 Q104.1
N$44  (via drill 0.6, 0.8 pad 1.68)
  Top 0.406: IC107.2 IC107.1 2.8,26.98 2.8,29.25 | 2.8,29.25 2.8,32.26 5.32,35.21 5.32,41.43 4.43,42.32 IC105.3 | Q106.1 8.29,32.57 v8.29,33.73 | v3.59,29.25 2.8,29.25 | Q1.1 5.65,16.36 v6.35,17.05
  Bottom 0.406: v8.29,33.73 5.7,29.25 | 5.7,29.25 v3.59,29.25 | v6.35,17.05 6.86,17.56 6.86,28.09 5.7,29.25
N$45
  Top 0.406: C107.1 43.62,20.58 R125.1 R130.2
N$46  (via drill 0.6)
  Top 0.406: 45.71,10.7 46.22,11.46 46.22,15.78 47.74,17.81 48.37,18.57 R130.1 48.12,20.25 C108.1 | 45.71,10.7 IC108.4 | IC108.10 49.3,9.4 50.5,9.4 51,8.9 v51.1,8.9 | v45.7,10.1 v45.71,10.11 45.71,10.7
  Bottom 0.406: v51.1,8.9 49.9,10.1 v45.7,10.1
N$47  (via drill 0.6)
  Top 0.406: R133.2 R132.2 38.6,13.37 39.1,12.86 39.1,11.21 R131.1 41.01,9.43 41.6,9.43 | IC108.5 41.6,9.43 | IC108.11 v51.2,10.7 | v41.7,10.1 41.6,9.9 41.6,9.43
  Bottom 0.406: v51.2,10.7 49.3,11.6 42.9,11.6 41.7,10.2 v41.7,10.1
N$48
  Top 0.406: R138.2 74.47,21.75 74.47,19.34 Q107.3
N$49  (via drill 0.6)
  Top 0.406: IC111.7 61.84,46.4 v62.23,46.01 | Q3.1 86.69,42.12 v86.61,42.2
  Bottom 0.406: v62.23,46.01 64.77,46.01 65.28,45.5 75.44,45.5 75.69,45.24 80.26,45.24 80.77,45.75 83.31,45.75 86.61,42.45 v86.61,42.2
N$50  (via drill 0.6)
  Top 0.406: IC107.4 4.52,22.51 4.96,23.15 4.96,29.56 v4.07,31.91
  Top 0.61: v3.29,46.27 3.29,44.86 IC105.1
  Bottom 0.406: v4.07,31.91 3.74,31.91 3.68,31.96
  Bottom 0.61: 3.68,31.96 3.67,32.1 3.67,45.86 v3.29,46.27
N$51
  Top 0.61: R115.1 54.28,15.53 X101.21
N$52
  Top 0.406: 9.28,26.32 IC107.16 10.02,26.32 10.9,27.2 10.9,29.5 10.3,30.1 10.3,30.99 Q106.3 | Q106.3 10.28,31.48 11.2,32.6 12,33.6 12.3,33.6 R9.1 | 10.2,30.95 Q106.3
N$53  (via drill 0.6)
  Top 0.61: TP25.TP 23.8,37.69
  Top 0.813: v30.59,37.69 23.8,37.69 2.10
  Bottom 0.813: X101.15 36.56,42.26 34.28,42.26 32.5,38.39 31.1,37.69 v30.59,37.69
N$54
  Top 0.813: D106.1 91.28,13.42 91.69,12.97
  Top 1.27: 91.69,12.97 91.69,9.05 R127.1
N$55
  Top 0.61: TP19.TP 31.86,19.36 30.98,20.25 2.5 | X101.9 80.2,15.27 85.02,15.27 D106.2
  Bottom 0.406: LED105.K 34.22,18.93 36.44,18.93 36.82,19.21 | 53.93,17.53 57.17,17.53 58.92,17.56
  Bottom 0.61: 2.5 LED105.K | 36.82,19.21 47.08,19.21 50.28,18.45 52.06,18.45 53.74,17.53 53.93,17.53 | X101.9 78.08,15.53 73.9,15.53 69.33,11.21 61.71,11.21 58.92,17.56
N$56  (1 unrouted)
  Top 0.406: IC105.14 7.74,42.32 7.1,41.69 7.1,34.83 6.74,33.81 6.74,22.26 4.83,19.97 3.06,19.97
N$57  (via drill 0.6)  (2 unrouted)
  Top 0.406: Q101.1 24.12,1.56 13.91,1.56 Q102.1 | 8.62,9.43 X102.2
  Top 0.61: 5.83,9.43 X102.2 8.84,11.3 R103.1 | 5.83,9.43 v5.51,9.49 | 5.83,9.43 3.99,9.43 R101.1 | 9.89,7.91 8.62,9.43 | Q102.1 12.33,3.08 Q102.2 | 9.89,3.33 6.72,3.33 | 9.13,1.56 9.13,3.59 | 8.37,3.08 8.37,5.11
  Top 0.813: 9.89,3.33 9.89,7.91
  Bottom 0.61: X102.2 v5.51,9.49 3.92,9.75 | 3.54,9.87 R104.1
  pour Top: 13.2,5.62 2.02,5.62 2.02,0.54 13.2,0.54
N$58
  Top 0.406: 1.8 12.89,30.7 | 15.67,30.58 TP8.TP 15.69,30.72 | R9.2 15.1,33.6 15.1,30.7
  Top 0.61: TP8.TP 15.1,30.7 12.99,30.7 | 12.81,30.7 12.99,30.7 | 12.99,30.7 1.8
N$59
  Top 0.406: Q101.2 16.5,3.08 14.97,6.64 12.43,6.64 TP2.TP
  Top 0.61: TP2.TP 12.3,8.92 12.3,9.55 1.2 | 21.07,2.45 19.67,2.45 | 21.07,3.97 19.67,3.97
  pour Top: 23.86,4.35 17.01,4.35 15.74,5.62 15.48,10.95 10.66,10.95 10.4,9.94 10.66,7.91 13.2,5.87 13.2,5.62 13.83,5.11 13.83,1.3 23.86,1.3
N$60  (via drill 0.6)
  Top 0.406: Q107.1 70.6,17.68 68.76,17.68 | 68.76,17.68 68.31,17.68 68.06,17.56 66.92,17.56 66.54,17.81 65.9,18.95 | v64.5,13.49 62.98,11.21 60.06,11.21 58.28,13.24 54.34,13.24 53.48,12.04 51.46,12.04 51.1,12.5 51.1,12.8 50.6,13.3 49.33,13.3 IC108.13 | R135.2 68.5,20.86 68.76,20.48 68.76,17.68
  Top 0.813: 65.9,18.95 JP105.1
  Bottom 0.406: v64.5,13.49 64.76,16.54 JP105.1
N$61  (1 unrouted)
  Top 0.305: 3.18,23.78 1.53,23.78 1.53,27.21 1.91,27.72
  Top 0.406: 1.91,27.72 1.91,32.84 4.48,35.53 4.48,38.51 IC105.6
N$64
  Top 0.61: IC109.2 R134.2
N$65
  Top 0.406: R144.2 60.57,36.48 61.33,35.59 62.22,34.52 IC110.5
N$67
  Top 0.406: IC107.10 10.55,18.7 11.18,18.19 12.05,17.64 1.4
  Top 0.61: TP4.TP 12.96,16.73 1.4
N$69  (via drill 0.6)
  Top 0.61: TP1.TP 1.1
  Top 0.813: D2.2 82.53,42.46 v81.52,42.51
  Bottom 0.61: 36.25,2.13 30.09,2.13
  Bottom 0.813: v81.52,42.51 82.41,42.21 82.45,35.7
  Bottom 1.016: 82.45,35.7 90.41,29.69 90.41,12.1 85.2,12.1 82.92,10.32 82.92,2.51 82.03,0.92 52.38,0.92 49.26,1.68 39.87,1.68 36.25,2.13 | 30.09,2.13 28.25,3.78 22.57,3.78 1.1
N$83
  Top 0.406: 44.95,3.84 44.95,5.24 IC108.7 | 46.03,4.03 R122.1 46.22,3.84 44.95,3.84 | 44.95,3.84 43.93,3.84 R121.1
N$84
  Top 0.406: Q106.2 8.77,30.13 9.5,29.4 9.5,28.59 R4.2
N$85  (1 unrouted)
  Top 0.406: Q103.1 63.24,16.06 65.15,15.78 R116.2
N$86
  Top 0.406: R144.1 60.95,39.91 63.49,39.91 | 63.49,39.91 IC110.3 | 63.49,39.91 64.38,40.8 IC111.12 64.38,45.87 65.53,47.02 65.53,48.33 IC111.4
N$87
  Top 0.406: R140.1 63.11,28.16 68.44,28.16 69.33,27.84 D112.1
N$88  (via drill 0.6)
  Top 0.406: IC107.15 9.43,24.92 10.31,25.12 11.37,26.39 v11.93,27.46 | R128.1 v81.27,17.81
  Bottom 0.406: v11.93,27.46 14.47,25.69 15.48,25.69 16.24,24.92 16.24,22.13 15.48,21.37 15.48,19.84 19.29,16.03 19.29,15.53 20.82,14 20.82,12.61 19.04,10.83 19.04,8.92 23.1,4.86 29.2,4.86 31.23,2.95 35.43,2.95 36.07,3.46 51.82,3.46 53.47,2.19 53.45,2.19 53.84,1.94 81.01,1.94 81.78,3.08 81.78,16.8 v81.27,17.81
N$89
  Top 0.406: IC111.14 66.92,40.8 69.58,39.15 69.58,37.75 R145.1 | 70.47,36.35 R145.1 | C110.1 68.69,34.32 70.47,35.72 R145.1
N$90
  Top 0.406: TP13.TP 23.73,44.74 2.12 23.99,45.01 23.99,46.13 25.9,48.04 R146.1
N$91
  Top 0.813: X101.1 80.38,47.28 81.1,47.24 83.06,47.24 D2.1
N$92
  Top 0.406: IC101.1 65.9,9.05 66.54,9.68 R108.2
N$93  (via drill 0.6)
  Top 0.813: D103.2 35.25,41.56 D102.2 34.28,39.4 v35.42,40.93
  Top 1.016: 1.10 TP10.TP 18.02,37.12 19.54,38.63 22.4,39.59 26.15,39.59 26.47,39.27 32.25,39.27 32.75,41.56
  Top 1.93: 32.75,41.56 35.25,41.56
  Bottom 0.61: 63.73,33.31 63.73,33.04 | SJ101.1 65.01,33.31 64.24,32.53
  Bottom 0.711: 54.22,37.37 59.55,37.37
  Bottom 0.813: v35.42,40.93 36.82,40.93 54.22,37.37 | 59.55,37.37 63.36,33.41 63.73,33.04 64.24,32.53 65.01,31.76 JP104.1
N$94
  Bottom 0.61: 69.49,32.92 68.6,33.31 SJ101.2
  Bottom 0.813: 87.36,28.1 R136.2 | 87.36,28.1 R137.2 | JP104.2 67.55,31.02 69.49,32.92 69.97,33.43 81.39,33.43 86.6,28.1 87.36,28.1
N$95  (via drill 0.6)
  Top 0.813: D109.1 93.73,15.78 v94.23,15.02
  Bottom 0.813: v94.23,15.02 94.23,14.76 94.49,13.24 94.49,10.7 94.74,10.45 94.74,7.14 91.44,3.84 89.02,3.84 JP102.2
N$96
  Top 0.406: C103.1 R108.1 R112.1
N$97  (1 unrouted)
  Top 0.406: IC101.5 69.9,12.79 70.73,13.62 | 70.73,13.62 71.36,14.26 | R112.2 71.87,12.48 70.73,13.62 | Q1.3 4.72,12.99 3.81,12.99 2.35,11.52 1.33,11.52 0.76,10.95 0.76,7.4 1.27,6.89 2.54,6.89 3.81,5.62 3.81,4.35 7.62,0.54 29.72,0.54 31.5,2.32 34.29,2.32 35.81,0.54 74.68,0.54 74.93,0.79 74.93,14.26 73.66,14.26 | 73.66,14.26 71.42,14.26 | R117.2 73.66,14.26
N$98
  Top 0.406: 38.22,35.32 38.68,35.32 D110.1
  Top 0.61: JP103.1 39.36,34.91 D110.1
N$99
  Top 0.406: 71.23,20.23 71.62,21.11 R138.1
  Top 0.813: 71.23,20.23 JP105.3
N$100
  Top 0.406: Q103.3 60.1,17.72 60.1,18.6 60.73,19.23 R5.1
N$101
  Top 0.406: R113.1 61.58,8.54 63.23,7.14 63.23,7.02 R114.2 63.36,7.14 64.76,8.41 64.76,9.94 65.52,10.7 67.81,10.7 68.31,11.21 68.31,12.66 IC101.6
N$102
  Top 0.305: 67.04,31.78 66.54,31.27 63.81,31.27 63.49,31.66
  Top 0.406: IC110.2 64.76,36.73 67.04,34.45 67.04,31.78 67.93,31.78 68.69,31.34 70.43,31.34 72.02,29.16 72.78,28.61 D112.2 74.03,28.44 C109.2 R141.1 74.16,35.59 74.18,36.87 75,37.69 D4.C | 63.49,31.66 IC110.6
N$103
  Top 0.406: IC111.2 68.33,48.44 68.33,47.02 68.83,46.51 69.85,46.51 70.87,47.53 71.5,47.53 C15.2 72.52,47.66 73.15,47.02 74.17,46.39 R10.1
N$104
  Top 0.406: SJ2.2 93.22,38.64 93.47,38.89 93.47,40.06 Q2.2
  Top 0.813: Q2.2 93.53,44.61 93.4,45.12 R129.2
N$107
  Top 0.406: IC101.7 67.31,12.93 67.31,14 | 67.31,14 67.82,14.51 69.09,14.51 R116.1 R117.1 | R115.2 52.96,13.11 53.85,14 58.67,14 60.45,11.97 62.48,11.97 63.25,13.11 63.25,14.13 63.5,14.51 66.8,14.51 67.31,14
N$108
  Top 0.406: 38.22,18.32 R133.1 38.94,18.26 39.3,17.9 39.3,15.9 42,13.2 43.63,13.2 IC108.2
N$580  (1 unrouted)
  Top 0.406: IC108.1 43.68,15.65 43.3,16.73 R124.2 43.3,18.07 42.53,18.45 42.28,18.57 R125.2
V+  (via drill 0.6)  (2 unrouted)
  Top 0.305: 95.17,30.63 95.2,30.75
  Top 0.406: 51.3,44.48 51.05,44.48 50.8,44.74 46.39,44.74 Q105.3 | 95.2,30.75 95.2,36.98 95.21,36.94 95.12,37.61 95.11,37.62 95,37.62 | 95.06,37.69 95,37.62 | 95,37.62 SJ2.1 95.06,37.95 Q2.3
  Top 0.61: Q104.3 90.7,20.96 89.53,21.81 | 89.53,21.81 v89.22,21.81 | 95.17,30.63 92.39,30.38 90.81,28.8 90.81,26.89 89.53,25.62 89.53,21.81 | D1.1 79.11,27.48 | 58.6,29.4 61.51,26.49 arc45 62.21,26.2 76.2,26.2 77.19,27.19 arc-45 77.89,27.48 78.9,27.48
  Top 0.813: 51.3,44.48 51.27,39.94 52.06,38.66 52.06,30.4 54.21,29.49 arc45 54.42,29.4 58.6,29.4
  Bottom 0.61: v89.22,21.81 85.09,20.54 79.11,26.52 79.11,27.48 X101.6
VCC  (via drill 0.6)
  Top 0.406: R124.1 45.26,16.73 45.43,15.65 45.43,11.97 IC108.3 41.64,11.97 41.14,12.48 41.07,12.48 R131.2 | R121.2 42.41,2.83 42.41,5.49 41.27,6.63 41.27,6.76 | IC102.1 36.47,6.23 35.93,6.64 | R113.2 63.36,10.45 | 63.36,10.45 65.01,12.73 65.84,12.73 IC101.8 | 63.36,10.45 60.57,10.45 59.17,9.68 53.84,9.68 v53.07,8.41 | 6V.TP 32.63,7.78 33.71,6.7
  Top 0.61: v40.12,13.62 R131.2 | 35.93,7.4 37.83,7.4 | 37.83,7.4 39.36,7.4 | C104.1 33.71,6.7 33.77,6.64 35.93,6.64 | R142.2 37.83,7.4
  Top 0.813: 35.93,6.64 35.93,7.4 | 39.36,7.4 40.63,7.4 | 40.63,7.4 v40.5,7.53 | 41.27,6.76 40.63,7.4
  Bottom 0.406: v53.07,8.41 52.22,7.21 49.26,7.14 48.88,6.76 41.75,6.76 40.99,7.53 v40.5,7.53
  Bottom 0.61: v40.5,7.53 40.5,13.11 v40.12,13.62

## Text on the board
Top: BEP V3.3 / maru-labs.com | top
Bottom: BEP V3.3 / maru-labs.com
tPlace: 4 | 2 | 3 | 1 | QC | b | c | 5 | a | 5 | 4 | 3 | 1 | 2
bPlace: QC
tNames: N | 78L10 | BSS138 | N | BSS138 | GND / / <> / / N / / G4 / / G2 / / CC | < / / > / / G5 / / G3 / / G1 / / / BAT
bNames: GND c b a 12V | GND / BT / HiB | BL <> / Resistor | RPM | RPM / SPD / HiB | WRN | 18 | enable / Bulb Test / on WRN / ON / OFF | 2.7 / 2.6 | 19 | 1.12 GND / 1.11< / 1.10<> / 1.9 > / 1 8 N / 1.7 G5 / 1.6 G4 / 1.5 G3 / 1.4 G2 / 1.3 G1 | enable / Choke / on WRN | 1.2 CC | 1 BAT / 2 GC / 3 GB / 4 GA / 5 Start / 6 SWP / 7 RES / 8 ABS / 9 ALT / 10TMP / 11 OIL | ALT / TMP / OIL / CHK / SWP | 1.1 BAT | OFF/ ON | 2.12 / 2.11 / 2.10 / / / / / 2.5 / 2.4 / 2.3 / 2.2 / 2.1 | CHK | 13 / 14 / 15 / 16 / 17 / / / / 21 SPDin / 22 SPDout / 23 / 24
tValues: M7 | M7 | SS12 | M7 | M7 | 2.4/1.1V | 6,8 | M7 | 4 | M7 | SS12 | SS12 | 13 GND / 14 BT / 15 HiB / 16RPM / 17 > / 18 GND / 19 < / / 21SPD in / 22SPD out / 23 GND | RPM / / HiB / / BT / / BAR / / TMP / / CHK | SPD / / WRN / / ABS / / ALT / / OIL / / SWP | 6V | SS12 | BA | 1 BAT / 2 GC / 3 GB / 4 GA / STRT / 6SWP / 7RES / 8 ABS / 9ALT / 10 TMP / 11OIL / 12CHK | BA | 4.7V
bValues: 2.2 kOhm / SPD / Pull-up / (Middle / Switch ) | OFF ON | BT | > | ABS | OFF/ ON | BAR/RES | > | BAR/RES | Mode / Selector
tStop: BEP V3.3 test / maru-labs.com
bStop: BEP V3.3 test / maru-labs.com